# Altium PCB PCB1.PcbDoc
Units mm, origin at the board's own origin, x right, y up, seen from the top; angles counter-clockwise.
Board outline 115.57 x 187.07 mm, 4 copper layers (Top Layer, Layer 1, Layer 2, Bottom Layer), stack 0.976 mm thick; 8 components, 6 nets, 35 pads, 0 vias.
Unrouted connection lines stored in the file: 4.
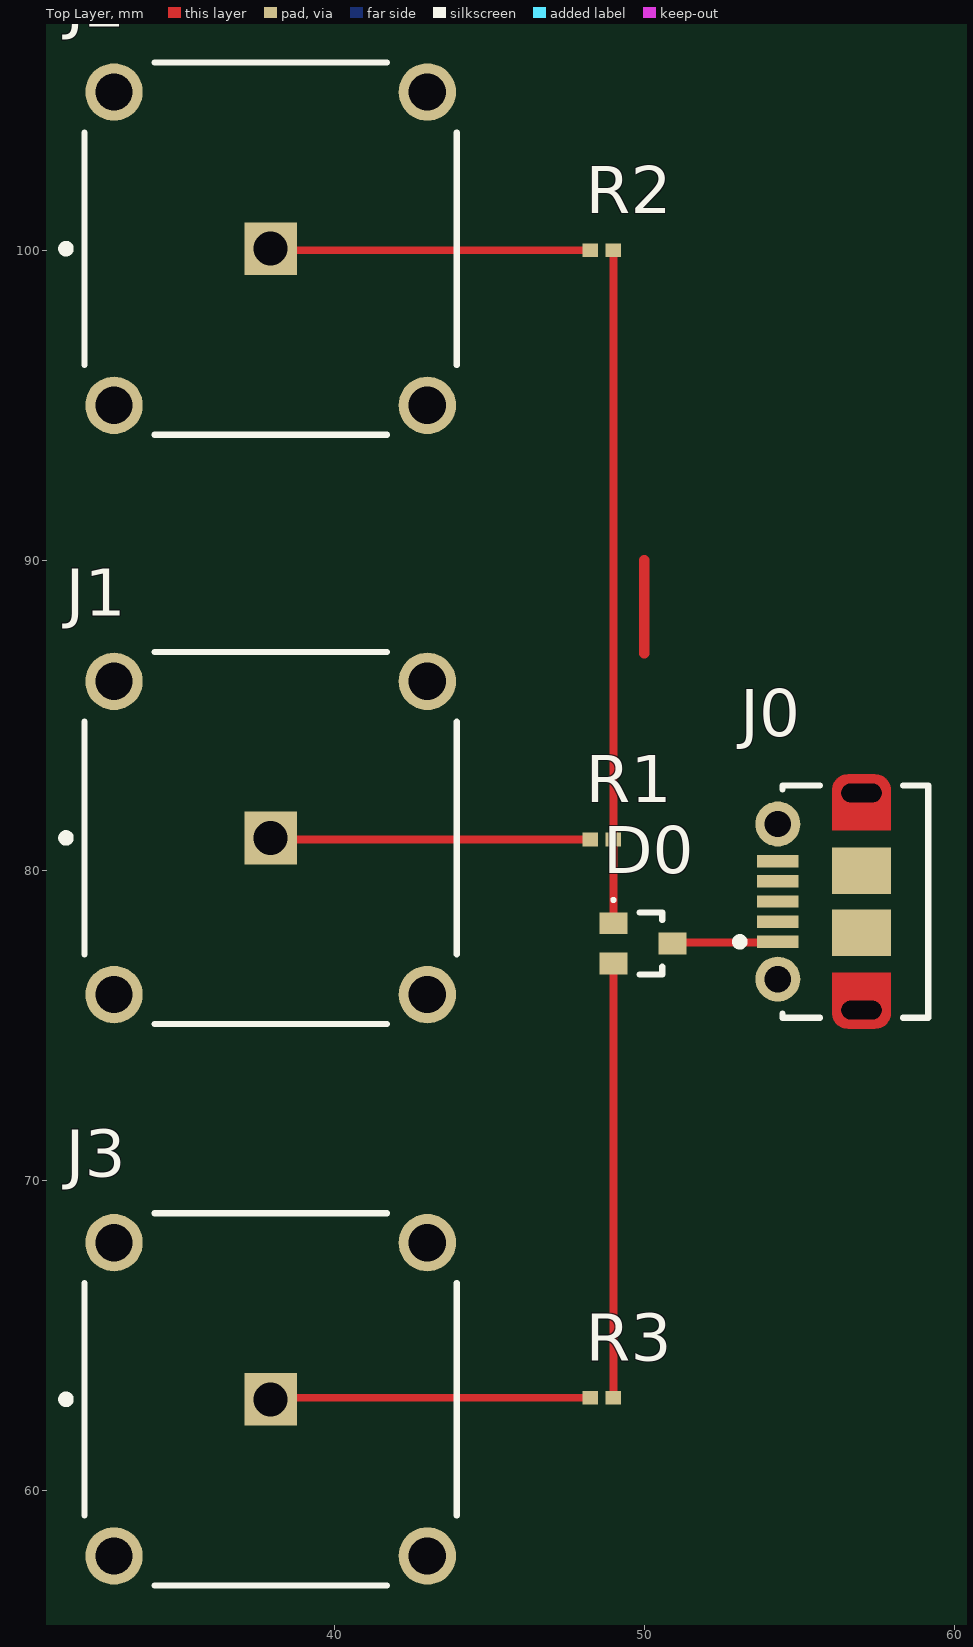
[diagram p0: Top Layer view]
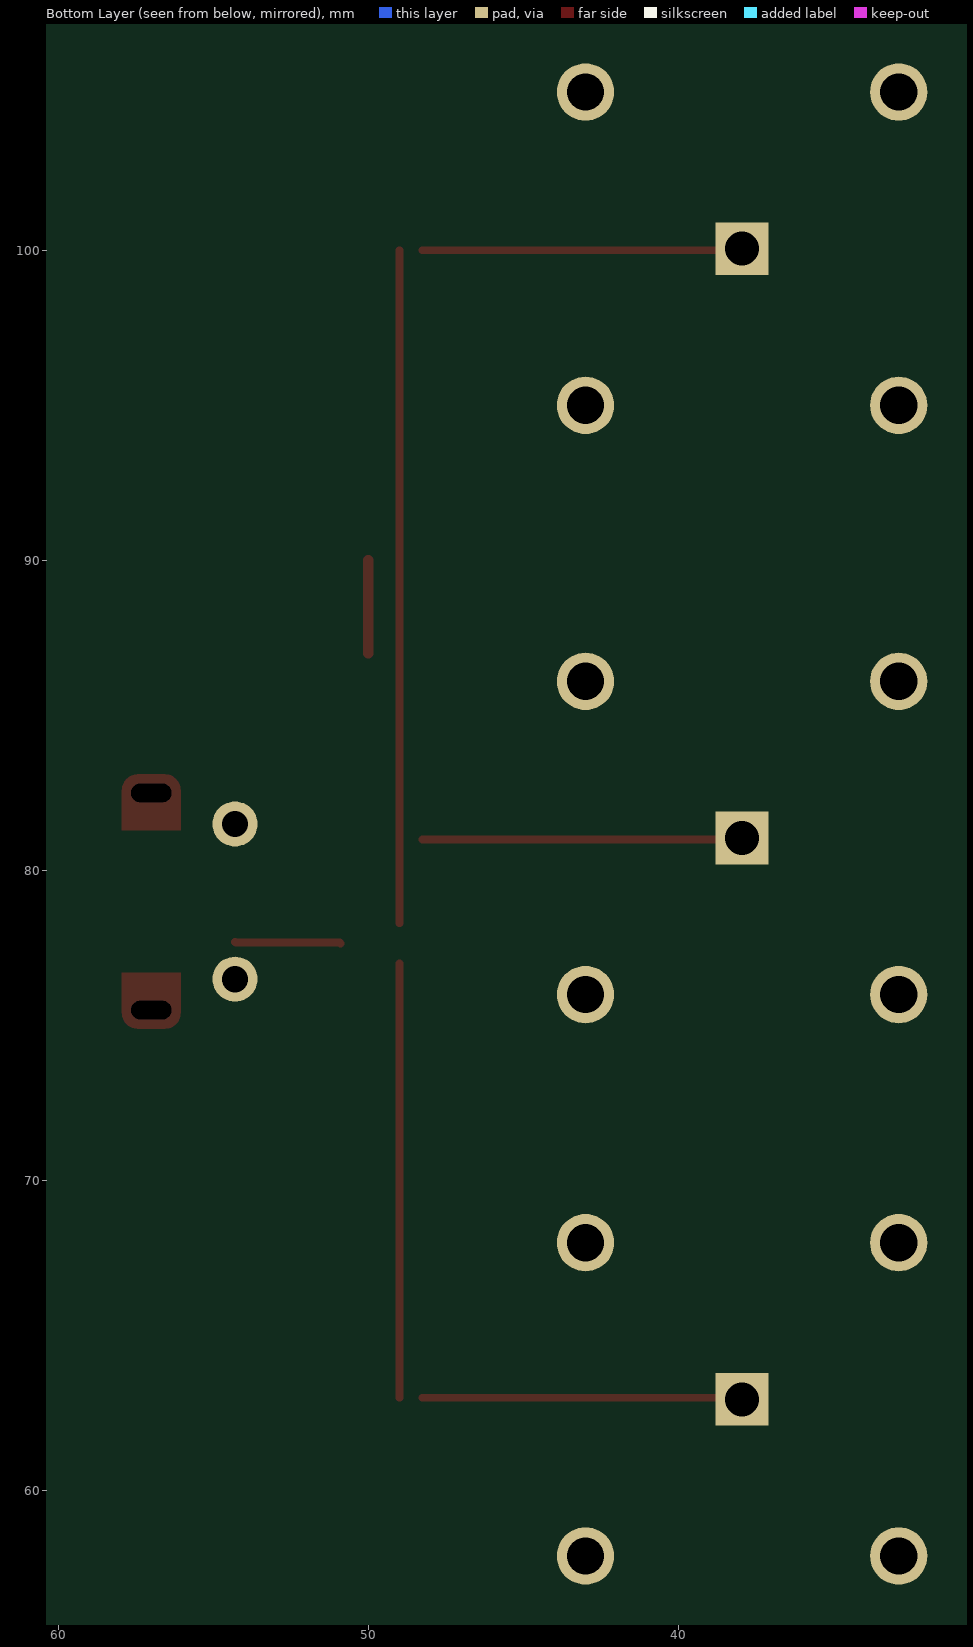
[diagram p1: Bottom Layer view, seen from below]
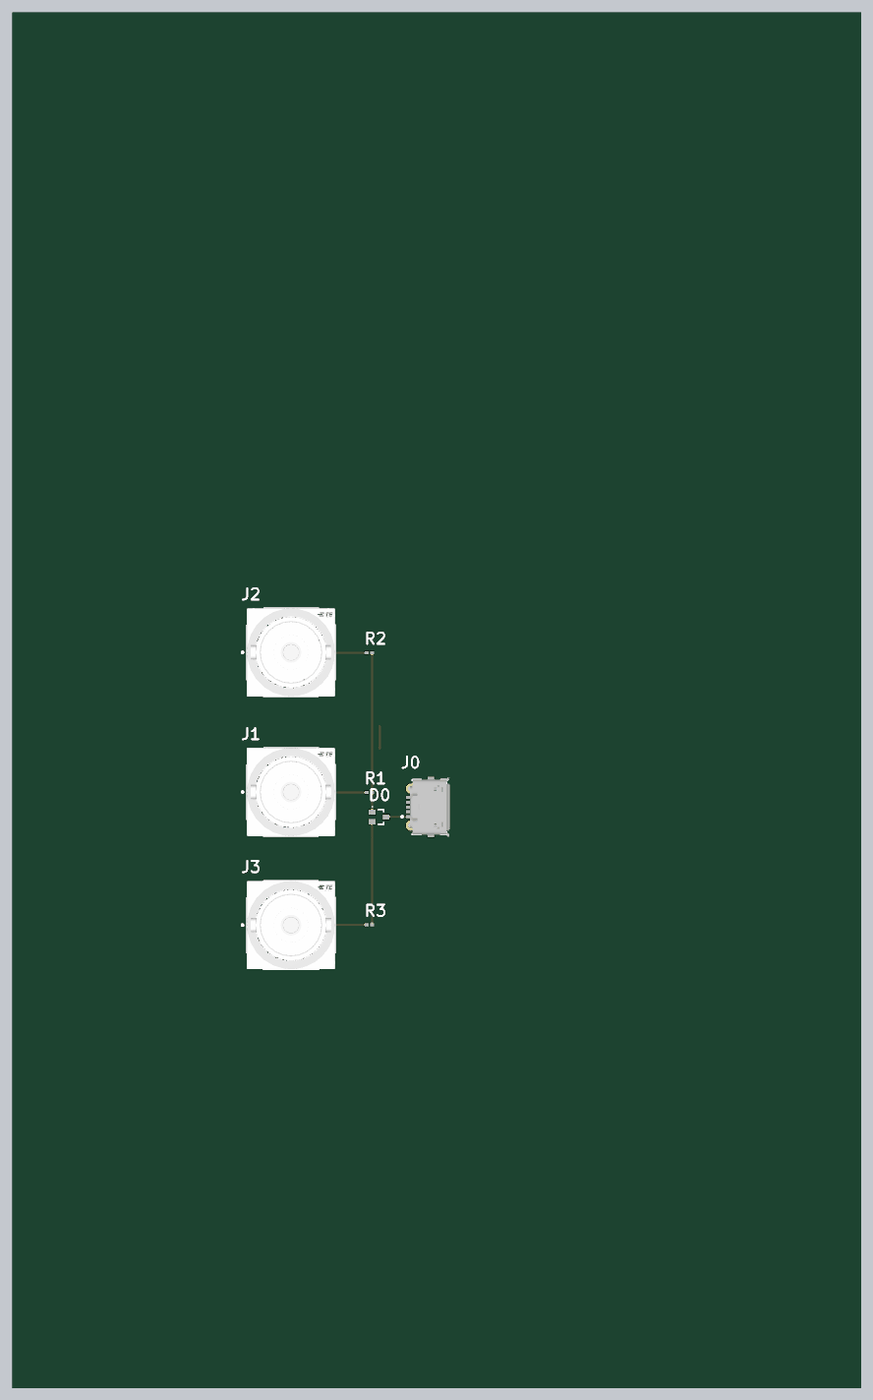
[diagram p2: 3D render of the assembled board from above, using the file's embedded part models]

## Layer stack, top to bottom
Top Solder: solder mask 0.0102, Solder Resist, Dk 3.5
Top Layer: signal copper 0.035
Dielectric 2: prepreg 0.203, PP-022, Dk 4.5
Layer 1: signal copper 0.025
Dielectric 1: dielectric 0.45, FR-4, Dk 4.8
Layer 2: signal copper 0.025
Dielectric 3: prepreg 0.203, PP-022, Dk 4.5
Bottom Layer: signal copper 0.035
Bottom Solder: solder mask 0.0102, Solder Resist, Dk 3.5

## Board outline
0,0 0,187.071 115.57,187.071 115.57,0

## Design rules (kind name [scope] priority, off if disabled: settings)
Clearance [All] p1: gap=0.254 ignorepadtopadclearanceinfootprint=FALSE
PolygonConnect [All] p1: connectstyle=Relief reliefconductorwidth=0.254 reliefentries=4 polygonreliefangle="90 Angle" airgapwidth=0.254
RoutingVias [All] p1: holewidth=0.711 width=1.27 viastyle="Through Hole" minholewidth=0.711 minwidth=1.27 maxholewidth=0.711 maxwidth=1.27
SolderMaskExpansion [All] p1: expansion=0.102 istentingtop=FALSE
Width [All] p1: maxlimit=0.335 minlimit=0.254 preferedwidth=0.254 midlayer1_maxwidth=0.254 midlayer2_maxwidth=0.254 bottomlayer_maxwidth=0.335 minimp=50.000000 maximp=50.000000 favimp=50.000000
30 further rules are at their usual default settings.

## Components (designator, comment, footprint, x,y, rotation, side; value= is the part's Value field where it differs from the comment)
D0 "DF3A6.8FUT1G" ONSC-SC-70-3-419-04_V 49.95,77.65 r0 top
J0 "105017-0001" USB-MICRO-B_V 55.65,79 r90 top
J1 "1-1337445-0" FP-1-1337445-0-MFG 37.95,81.05 r0 top
J2 "1-1337445-0" FP-1-1337445-0-MFG 37.95,100.05 r0 top
J3 "1-1337445-0" FP-1-1337445-0-MFG 37.95,62.95 r0 top
R1 "MCMR04X4301FTL" RESC1005X40X25LL05T10 48.625,81 r0 top
R2 "MCMR04X4301FTL" RESC1005X40X25LL05T10 48.625,100 r0 top
R3 "MCMR04X4301FTL" RESC1005X40X25LL05T10 48.625,63 r0 top

## Footprints (in the part's own frame and the unit in brackets; to place one, negate y for a bottom-side part, rotate by r counter-clockwise, add the part's x,y. Pads: shape width x height; smd on the part's side, far side on the other; paste and mask are expansions set on the pad)
FP-1-1337445-0-MFG [mm]
  rect 1.7x1.7 hole 1.1 paste-2539.97 mask+0: 1(0,0)
  round 1.85 hole 1.2 paste-2539.97 mask+0: 2(-5.05,5.05) 3(5.05,5.05) 4(-5.05,-5.05) 5(5.05,-5.05)
  silkscreen extent -6.72,-6 6,6, body extent -6.1,-6.1 6.1,6.1, height 0.25
ONSC-SC-70-3-419-04_V [mm] "SOT23, 3-Leads, Body 2x1.25mm, Pitch 0.65mm"
  rect 0.9x0.7 smd: 1(-0.95,0.65) 2(-0.95,-0.65) 3(0.95,0)
  silkscreen extent -1,-1 0.63,1.45, body extent -0.63,-1 0.63,1, height 1
RESC1005X40X25LL05T10 [mm] "Chip Resistor, 2-Leads, Body 1.00x0.50mm, IPC High Density"
  rect 0.5x0.45 smd: 1(-0.375,0) 2(0.375,0)
  body extent -0.53,-0.27 0.53,0.28, height 0.4
USB-MICRO-B_V [mm] "USB, MICRO B, Body 7.491x4.695 mm, Pitch 0.65 mm"
  rect 0.4x1.35 smd: 1(-1.3,1.35) 2(-0.65,1.35) 3(0,1.35) 4(0.65,1.35) 5(1.3,1.35)
  round 1.45 hole 0.85: 6(-2.5,1.35) 7(2.5,1.35)
  rrect50% 0x0 hole 0.6 slot 1.3 at 90 deg: 8(-3.5,-1.35) 11(3.5,-1.35)
  rect 1.5x1.9 smd: 9(-1,-1.35) 10(1,-1.35)
  Top Layer circle w0.5: c-3.6,-1.8 r0.25
  Top Layer circle w0.5: c-3.6,-0.9 r0.25
  Top Layer circle w0.5: c3.6,-1.8 r0.25
  Top Layer circle w0.5: c3.6,-0.9 r0.25
  Top Layer region: -3.6,-1.8 -3.6,-0.9 -4.1,-0.9 -4.1,-1.8
  Top Layer region: 3.6,-0.9 3.6,-1.8 4.1,-1.8 4.1,-0.9
  Top Layer region: 2.3,-0.4 2.3,-2.3 3.6,-2.3 3.6,-0.4
  Top Layer region: -2.3,-2.3 -2.3,-0.4 -3.6,-0.4 -3.6,-2.3
  silkscreen extent -3.75,-3.5 3.75,2.7, body extent -4.1,-3.9 4.1,1.5, height 2.67

## Part data
D0: library part CMP-1063-00026-1, "Zener Transient Voltage Suppressor, Dual Common Anode Zeners for ESD Protection, 3-Pin SC70, Pb-Free, Tape and Reel", Manufacturer="On Semiconductor", ComponentLink1Description="Manufacturer URL", ComponentLink1URL=http://www.onsemi.com/, ComponentLink2Description=Datasheet, ComponentLink2URL=http://www.onsemi.com/pub_link/Collateral/DF3A6.8FUT1-D.PDF, ComponentLink3Description="Package Specification", ComponentLink3URL=http://www.onsemi.cn/pub_link/Collateral/419-04.PDF, DatasheetVersion="Rev. 1", Direction=Unidirectional, IR Max (uA)=0.5, Mounting Technology="Surface Mount", Number of Lines=2, PackageDescription="3-Pin Small Outline Transistor, Body 2 x 1.25 mm, Pitch 0.65 mm", PackageReference=SC-70-3-419-04, PackageVersion="Rev. N, 11/2008", Packing="Tape and Reel", PartNumber=DF3A6.8FUT1G, RoHS=Pb-Free
J0: library part CMP-2000-05827-1, "Micro-USB B Receptacle, Right Angle, Bottom Mount, Surface Mount, with Solder Tabs, -30 to 85 degC, 5-Pin USB, RoHS, Tape and Reel", Manufacturer=Molex, Package Description="5-Leads USB, Micro B, Body 7.5 x 5 mm, Pitch 0.65 mm", Package Reference=MICRO-B, Package Version="Rev. F, 12/2012", Standard Package=1, Voltage - Max=30V, 3D Model=105017-0001.stp, Catalog Drawings=1050170001, Category=Connectors,Interconnects, Circuits=5, Connector Type=USB-microB, Datasheet URL=http://www.molex.com/elqNow/elqRedir.htm?ref=http://www.molex.com/webdocs/datasheets/pdf/en-us/1050170001_IO_CONNECTORS.pdf, Datasheet Version=03/2016, Family=USB,DVI,HDMIConnectors, Featured Product=Micro-USBConnectorsUSBConnectors, Features=Shielded,SolderRetention, Gender=Receptacle, Ingress Protection=-, Manufacturer URL=http://www.molex.com/, Mating Products=WM17145-ND-CABLEMICROUSBBTOSTDA1.0MWM17147-ND-CABLEMICROUSBBTOSTDA2.0MWM17146-ND-CABLEMICROUSBBTOSTDA1.5M, Mounting Technology=SurfaceMount, Mounting Type=BoardCutout,SurfaceMount,RightAngle, Number of Contacts=5, Online Catalog=Molex-MicroUSB, Other Names=WM1399DKR, Package URL=http://www.molex.com/pdm_docs/sd/1050170001_sd.pdf, Packaging=Digi-Reel®, PCN Assembly/Origin=ResinSupplier21/Oct/2015, RoHS Information=1050170001CertofCompliance, Series=-, Specifications=-
J1 J2 J3: library part CMP-03357-000006-1, "CONN BNC JACK STR 50 OHM PCB", Dielectric Material=PTFE, Frequency=4GHz, Insulation Resistance=5GR, Max Operating Temperature=165°C, Min Operating Temperature=-65°C, Operating Frequency="0 to 4Hz", Package Quantity=50, Body Material=Brass, Body Plating=Silver, Connector Type=BNC, Contact Material=Brass, Contact Plating=Silver, Depth=12mm, ELV=Compliant, Fastening Type=Bayonet, Gender=Female, Impedance=50R, Insulation Material=Polytetrafluoroethylene, Length=12mm, Material=Brass, Max Frequency=4GHz, Mount="Through Hole", Number of Positions=1, Orientation=Straight, Packaging=Bag, PCB Mount Retention=With, PCB Mounting Orientation=Vertical, PCB Thickness=0.126inch, Radiation Hardening=No, RoHS Compliant=Yes, Sealable="No (Without)", Series=BNC, Termination=Solder
R1 R2 R3: library part CMP-2002-06733-1, Manufacturer=Multicomp, Part Number=MCMR04X4301FTL

## Nets (pads, with @x,y where several pads share a name; then routed paths per layer and width w, separated by ;. In a path a pad name is that pad's centre, name@x,y a point inside that pad or via, vN(x,y) a via of type N, cw(c..) or ccw(c..) an arc to the next point about the centre after c; other vN are vias at no path point)
GND: J0.5 J0.6 J0.7 J0.8 J0.9 J0.10 J0.11 J1.2 J1.3 J1.4 J1.5 J2.2 J2.3 J2.4 J2.5 J3.2 J3.3 J3.4 J3.5
NetD0_3: D0.3 J0.1 | length 3.4
  Top Layer w0.254: D0.3 50.925,77.675 54.275,77.675 J0.1
NetJ1_1: J1.1 R1.1 | length 10.3
  Top Layer w0.254: J1.1 38,81 R1.1
NetJ2_1: J2.1 R2.1 | length 10.3
  Top Layer w0.254: J2.1 38,100 R2.1
NetJ3_1: J3.1 R3.1 | length 10.3
  Top Layer w0.254: J3.1 38,63 R3.1
VDD: D0.1 D0.2 R1.2 R2.2 R3.2 | length 35.7
  Top Layer w0.254: R3.2 D0.2 ; D0.1 R1.2 R2.2
pads on no net: J0.2 J0.3 J0.4
copper on no net: | length 3
  Top Layer w0.335: 50,87 50,90

## Text inside footprints (layer, text, board x,y; h text height)
J0: Mechanical 1 "PCB EDGE" at 58.55,71.8 h0.3 r90